# EAGLE board untitled (EAGLE 9.6.2)
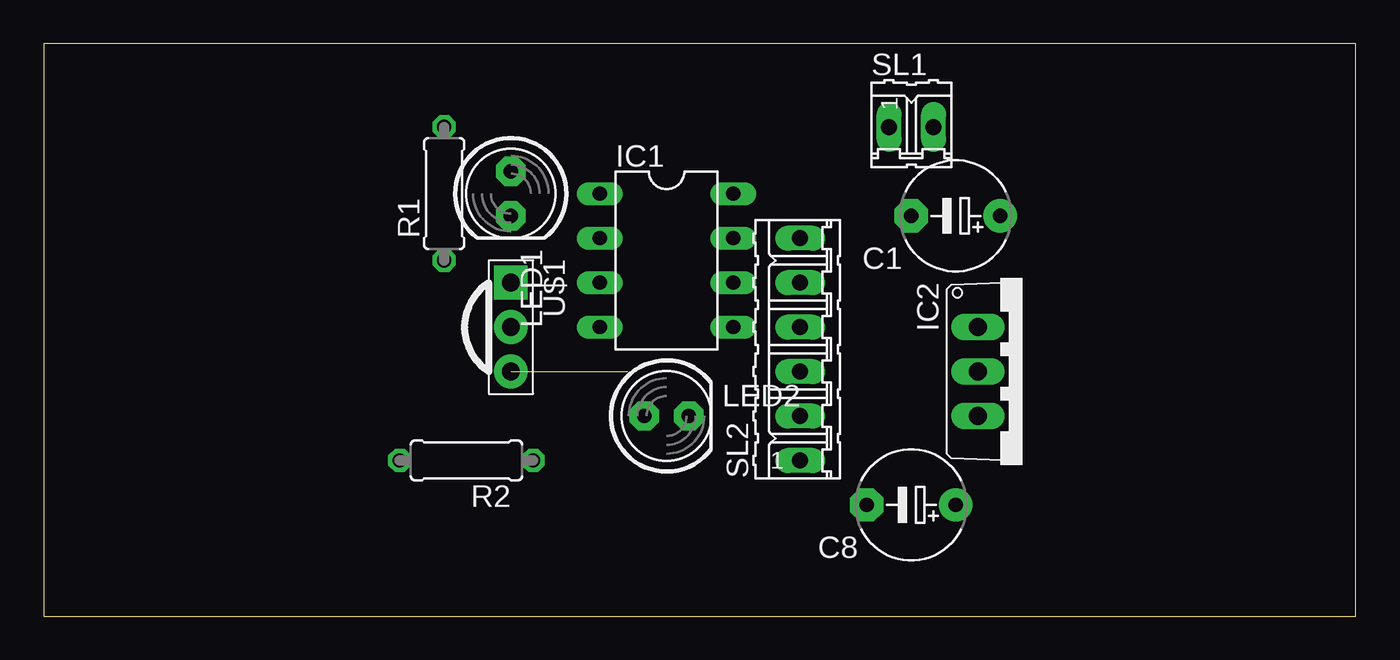
[diagram p0: board, top side]
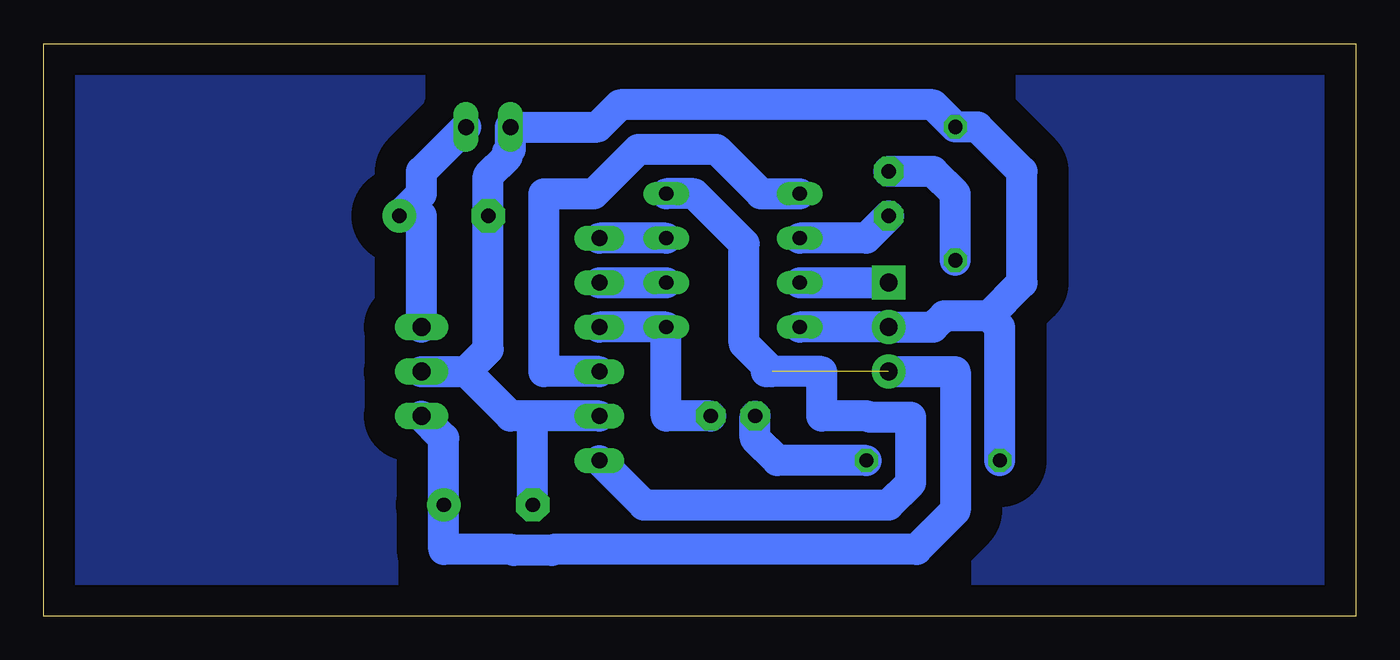
[diagram p1: board, bottom side, seen from below]

Size 74.91 x 32.69 mm. Coordinates in mm from the lower left corner, seen from the top.
Outline: 0,0 74.91,0 74.91,32.69 0,32.69 0,0
Copper layers (1*16): Top 0.035mm / dielectric 1.5mm / Bottom 0.035mm
Design rules "default *": minimum track width 70mil, minimum drill 0.35mm, track to track 30mil, track to pad 30mil, pad to pad 30mil, via to via 30mil, smd to smd 6mil, copper to edge 40mil, drill to drill 6mil, minimum pad ring 10mil, minimum via ring 8mil, stop-mask expansion 4mil, vias tented up to drill 0mil, thermal gap 10mil

## Footprints (pad centres in the part's own frame; a part is rotated, then mirrored left to right if it is on the bottom)
E5-6 = drill 0.813 pad 1.905: + -2.54,0 | drill 0.813 pad 1.905 octagon: - 2.54,0
DIL08 = drill 0.813 long: 1 -3.81,-3.81; 2 -1.27,-3.81; 3 1.27,-3.81; 4 3.81,-3.81; 5 3.81,3.81; 6 1.27,3.81; 7 -1.27,3.81; 8 -3.81,3.81
TO220V = drill 1.016 long: 1 -2.54,-2.54; 2 0,-2.54; 3 2.54,-2.54
LED5MM = drill 0.813 pad 1.676 octagon: A -1.27,0; K 1.27,0
0207/7 = drill 0.813 octagon: 1 -3.81,0; 2 3.81,0
02P = drill 0.914 long: 1 -1.27,0; 2 1.27,0
06P = drill 0.914 long: 1 -6.35,0; 2 -3.81,0; 3 -1.27,0; 4 1.27,0; 5 3.81,0; 6 6.35,0
PNA460XM = drill 1.016 pad 1.93 square: 1 -2.54,0 | drill 1.016 pad 1.93: 2 0,0; 3 2.54,0

## Placement (x,y rotation side)
C1  [E5-6]  52.07,22.86 180 top
C8  [E5-6]  49.53,6.35 180 top
IC1  ATTINY13-20PU  [DIL08]  35.56,20.32 270 top
IC2  786TV  [TO220V]  55.88,13.97 270 top
LED1  [LED5MM]  26.67,24.13 270 top
LED2  [LED5MM]  35.56,11.43 0 top
R1  [0207/7]  22.86,24.13 90 top
R2  [0207/7]  24.13,8.89 180 top
SL1  [02P]  49.53,27.94 0 top
SL2  [06P]  43.18,15.24 90 top
U$1  PNA460XM  [PNA460XM]  26.67,16.51 270 top

## Library data of the parts
C1 C8 = BeagleBone_Blue_R3
IC1 = attiny13
IC2 = linear
LED1 LED2 R1 R2 U$1 = adafruit
SL1 SL2 = con-amp-quick; OC_FARNELL: unknown; OC_NEWARK: unknown

## Nets
GND: C1.- C8.- IC1.4 IC2.2 R1.2 R2.2 SL1.1 SL2.2 U$1.2
N$1: IC1.3 U$1.1
N$2: IC1.2 LED1.K
N$3: LED1.A R1.1
N$5: LED2.A R2.1
N$6: IC1.7 SL2.6
N$7: IC1.6 SL2.5
N$8: IC1.5 LED2.K SL2.4
N$9: IC1.1 SL2.3
PWR: C1.+ IC2.1 SL1.2
VCC: C8.+ IC1.8 IC2.3 SL2.1 U$1.3

## Tracks (layer width: path | path; a pad name or v marks a point on that pad's centre or on a via)
GND
  Bottom 1.778: IC1.4 U$1.2 24.13,16.51 23.49,17.14 20.95,17.14 | R2.2 20.32,16.51 20.95,17.14 | IC2.2 50.8,13.97 | 50.8,13.97 49.53,15.24 C1.- 49.53,25.16 48.44,26.25 48.44,26.49 48.26,26.67 SL1.1 43.28,27.94 42.01,29.21 24.13,29.21 R1.2 21.59,27.94 19.05,25.4 19.05,19.05 20.95,17.14 | SL2.2 46.99,11.43 | 46.99,11.43 48.26,11.43 50.8,13.97 | C8.- 46.99,11.43
N$1
  Bottom 1.778: IC1.3 U$1.1
N$2
  Bottom 1.778: LED1.K 27.94,21.59 IC1.2
N$3
  Bottom 1.778: R1.1 22.86,24.13 24.13,25.4 LED1.A
N$5
  Bottom 1.778: R2.1 33.02,8.89 34.29,10.16 LED2.A
N$6
  Bottom 1.778: IC1.7 SL2.6
N$7
  Bottom 1.778: SL2.5 IC1.6
N$8
  Bottom 1.778: LED2.K 39.37,11.43 IC1.5 SL2.4
N$9
  Bottom 1.778: IC1.1 33.97,24.13 36.51,26.67 40.96,26.67 43.5,24.13 46.36,24.13 46.36,13.97 SL2.3
N$10
  pour Bottom (isolate 1.778): 0,33.02 74.93,33.02 74.93,0 0,0
PWR
  Bottom 1.778: SL1.2 53.34,25.4 53.34,24.13 C1.+ 53.34,22.86 IC2.1
VCC  (1 unrouted)
  Bottom 1.778: U$1.3 22.86,13.97 22.86,6.03 25.08,3.81 45.85,3.81 45.91,3.75 48.07,3.75 48.13,3.81 52.07,3.81 C8.+ 52.07,10.16 IC2.3 | IC1.8 37.78,24.13 34.92,21.27 34.92,15.56 33.5,14.13 | 33.34,13.97 33.5,14.13 | SL2.1 40.64,6.35 26.67,6.35 25.4,7.62 25.4,11.35 27.75,11.35 27.83,11.43 30.48,11.43 30.48,13.97 33.66,13.97 33.5,14.13